# Altium PCB Modular Parent Motherboard.PcbDoc (part 1 of 2)
Units mil, origin at the board's own origin, x right, y up, seen from the top; angles counter-clockwise.
Board outline 8750 x 5625 mil, 4 copper layers (Top Layer, Internal Plane 1, Internal Plane 2, Bottom Layer), stack 30.634 mil thick; 150 components, 101 nets, 734 pads, 495 vias.
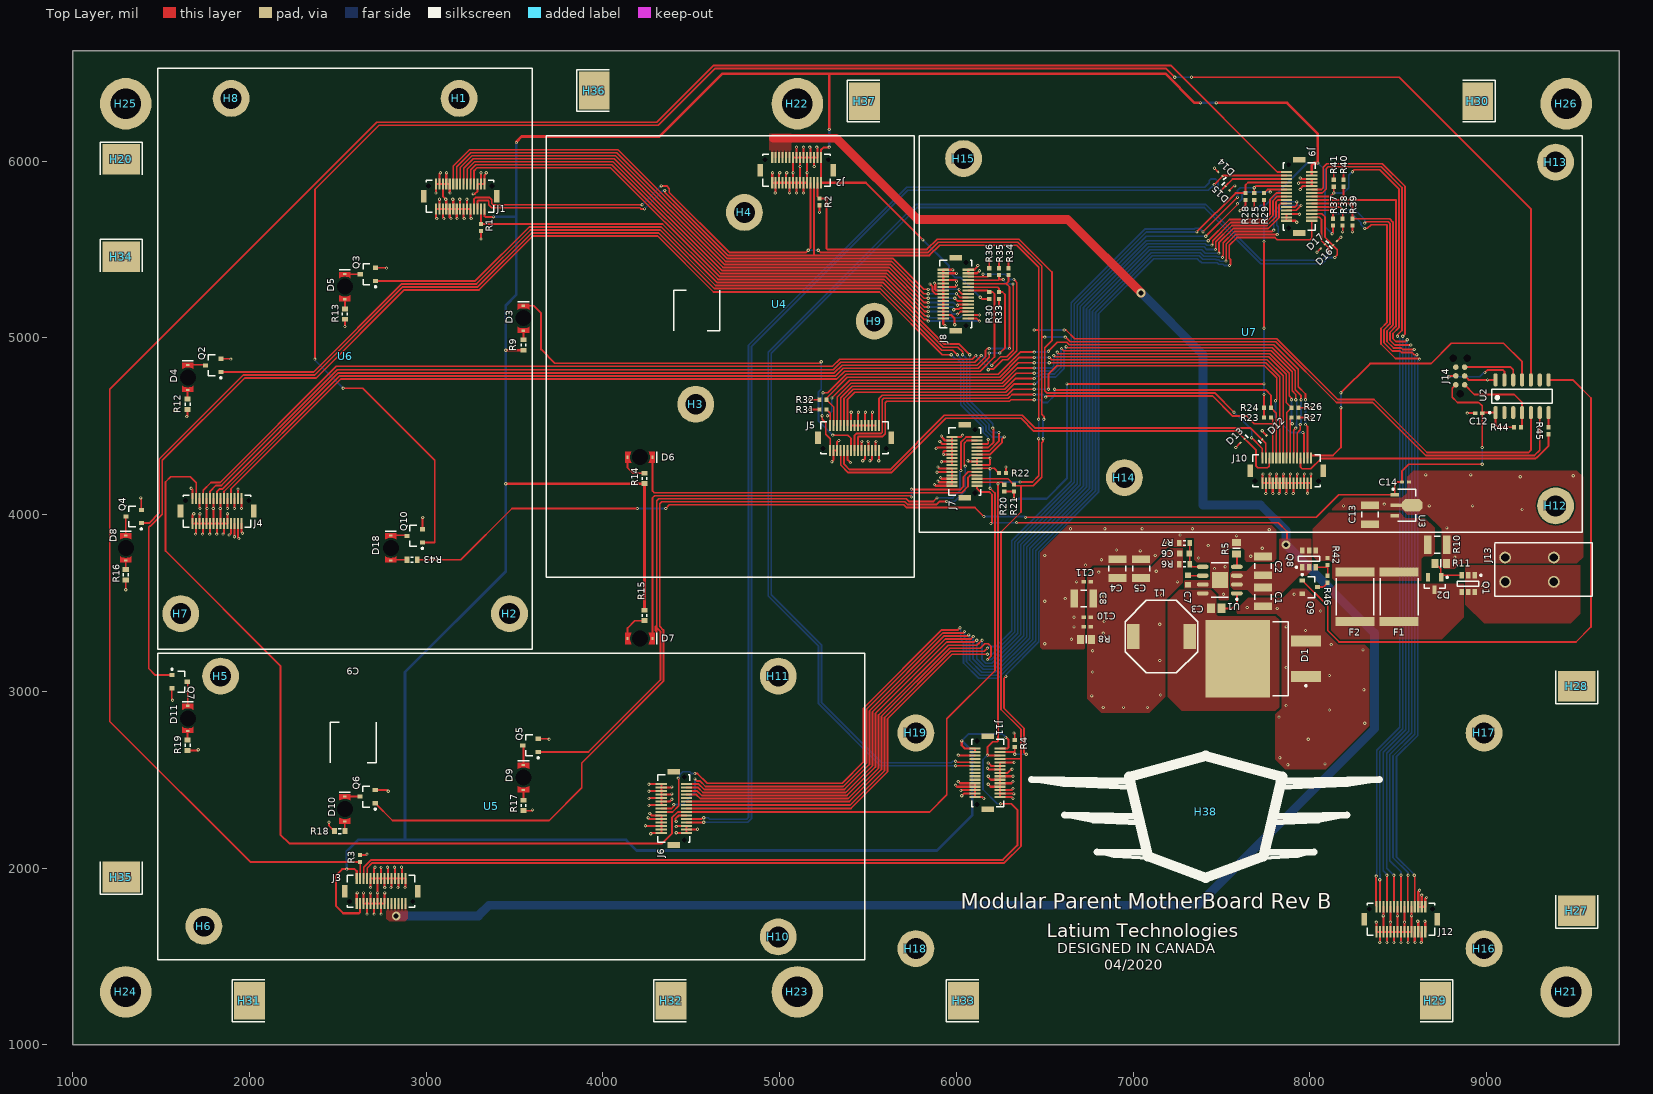
[diagram p0: Top Layer view]
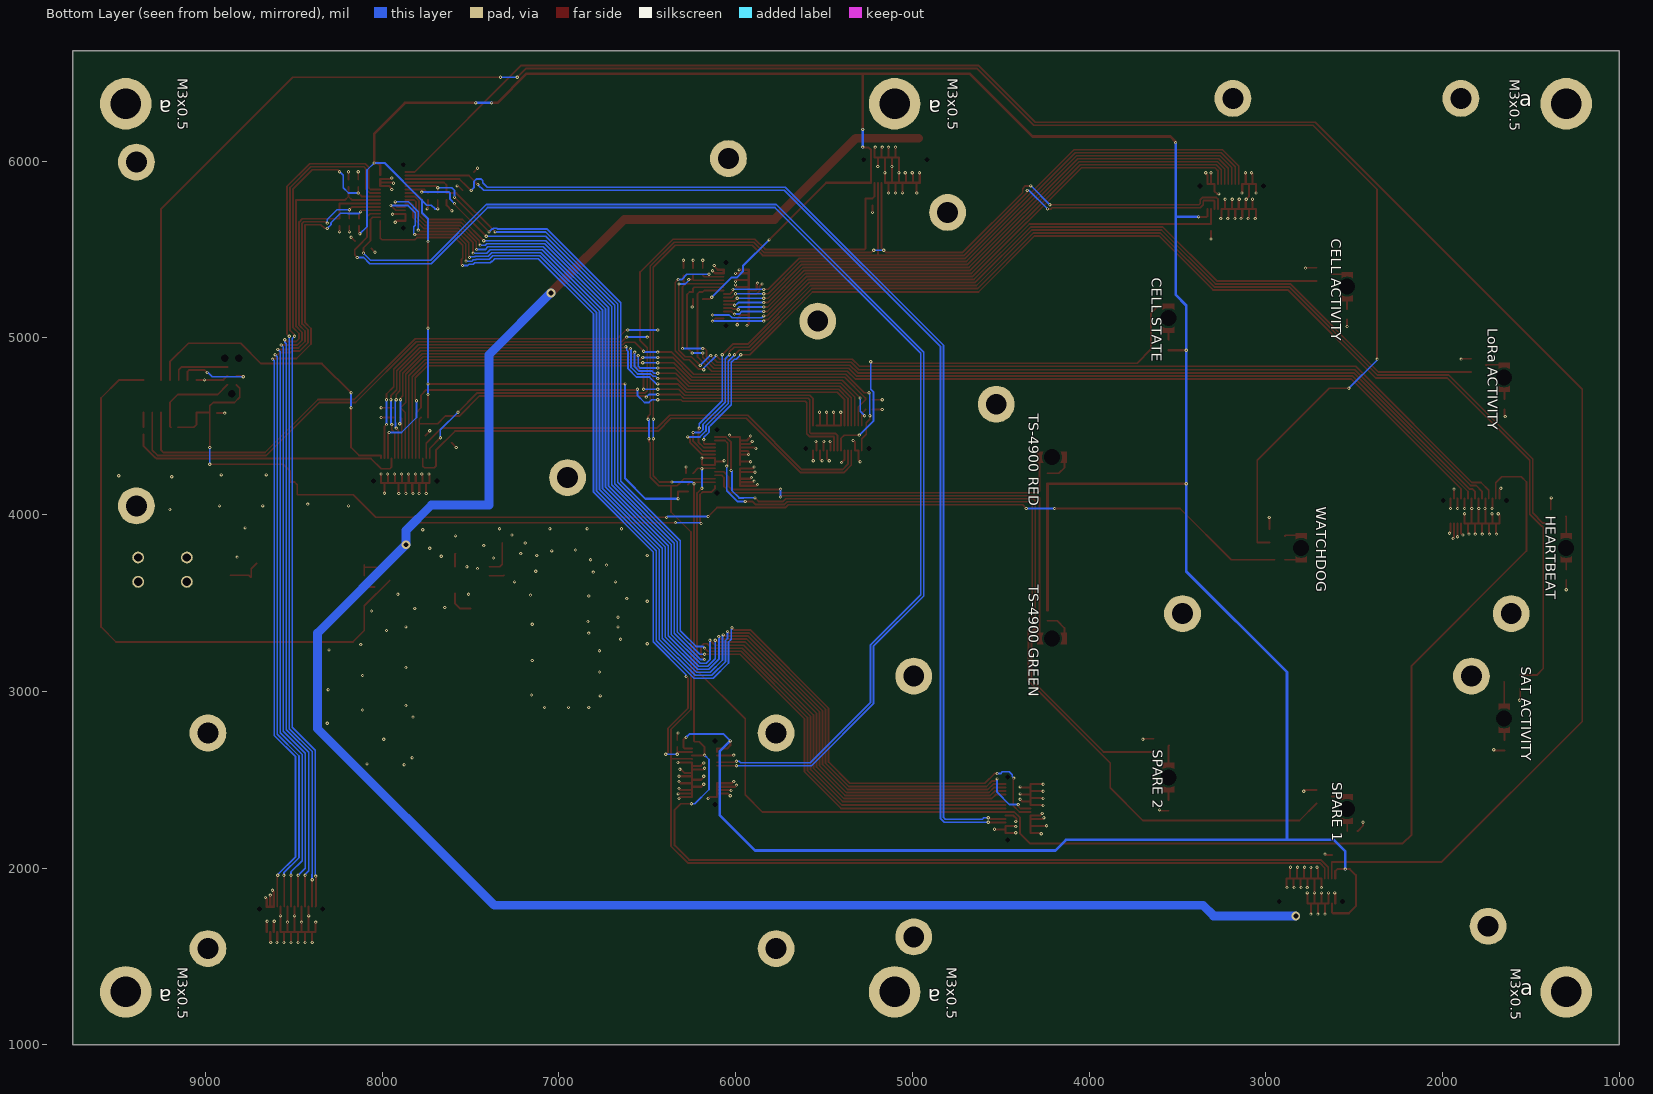
[diagram p1: Bottom Layer view, seen from below]
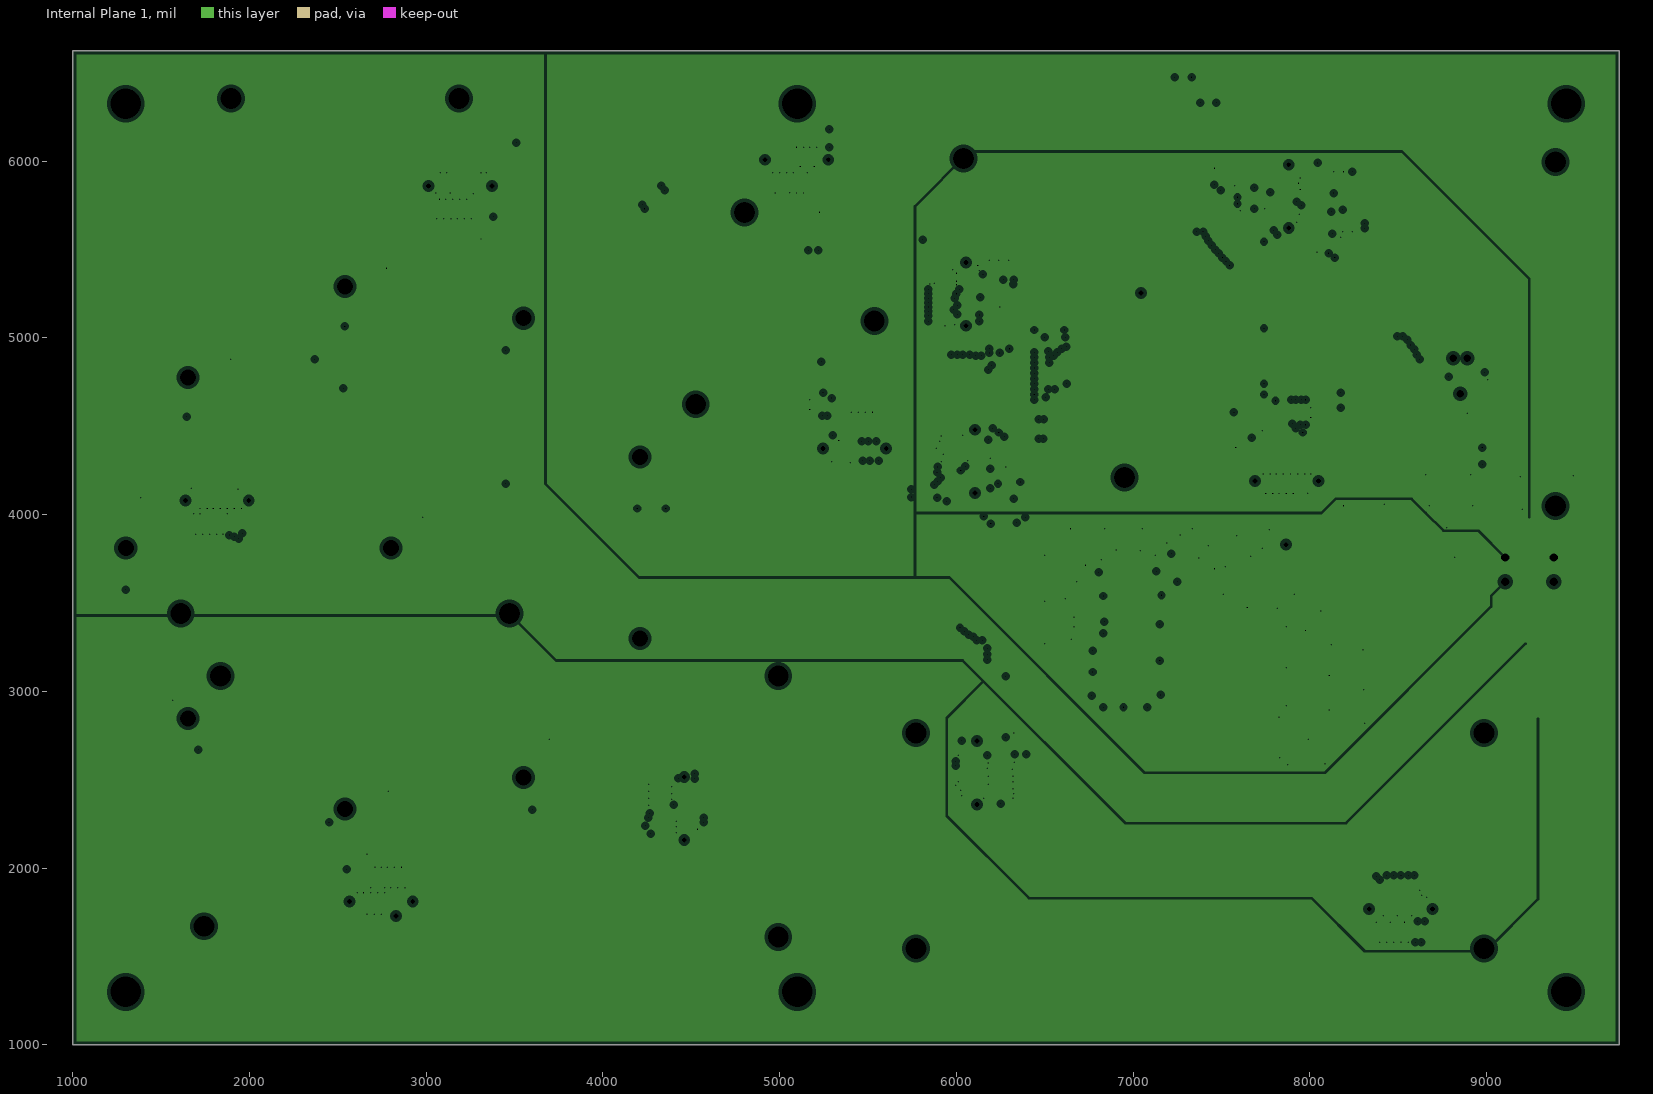
[diagram p2: Internal Plane 1, clearances drawn from the general rule]
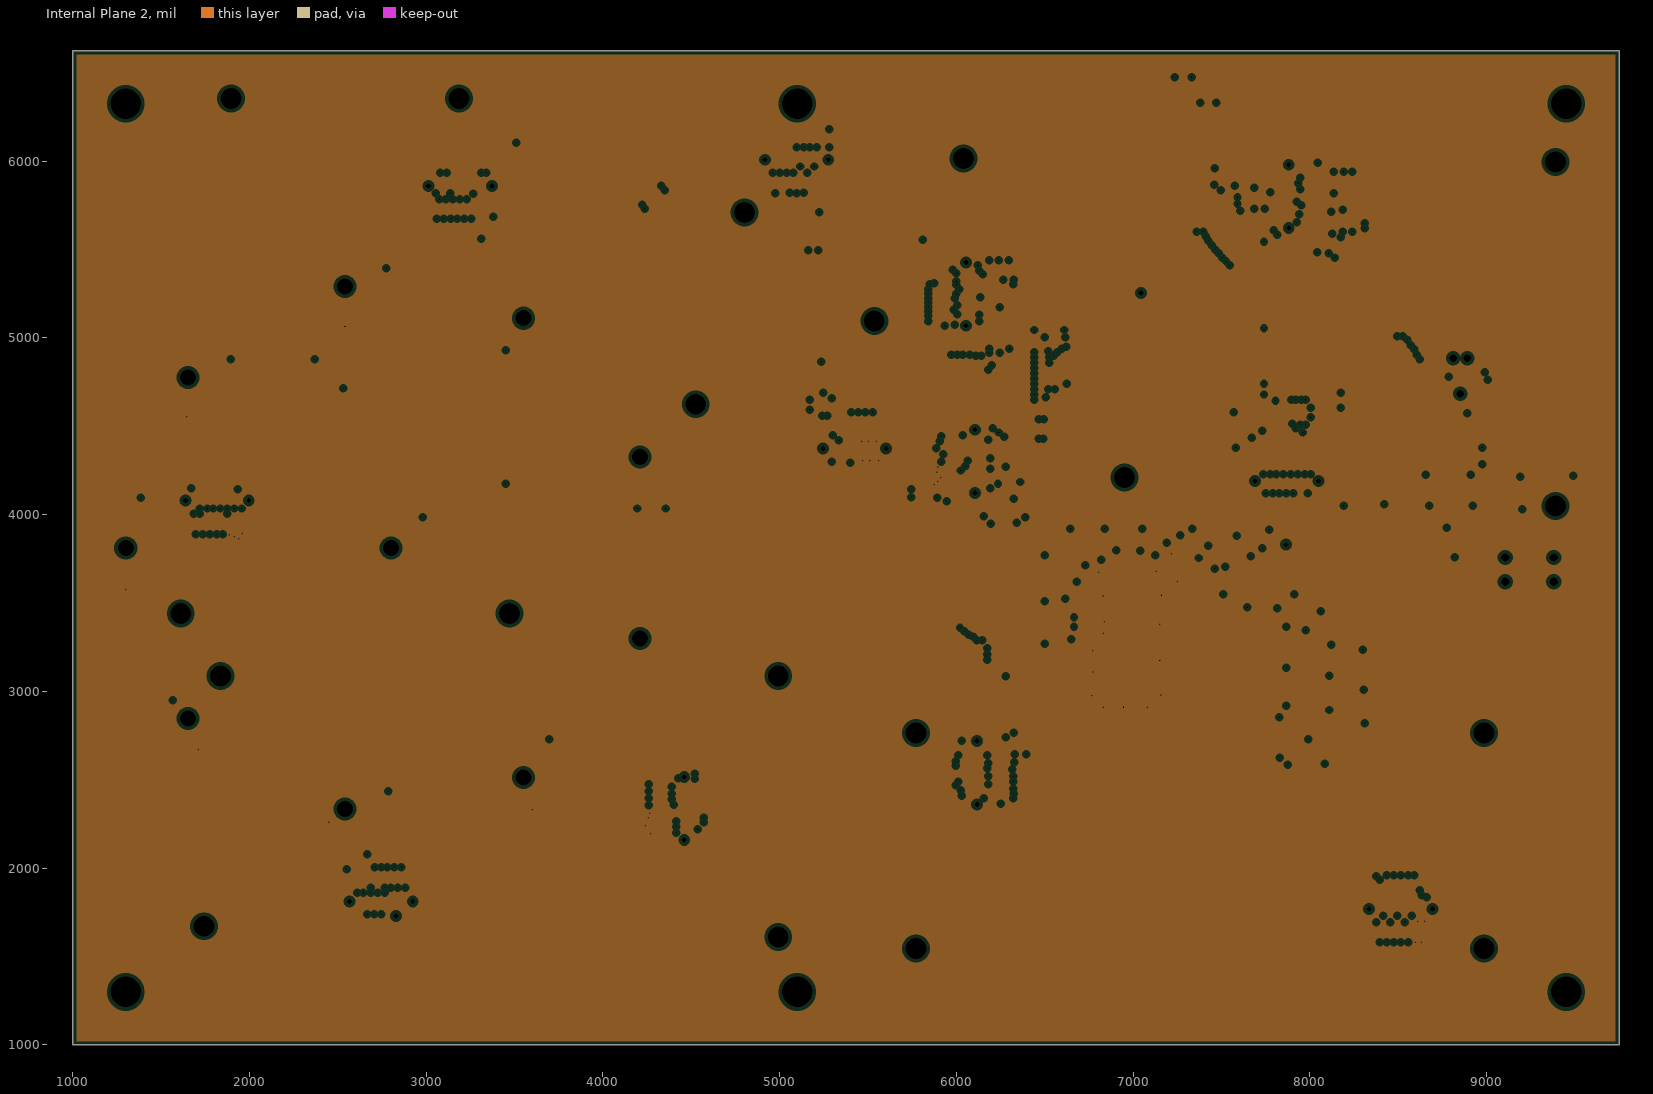
[diagram p3: Internal Plane 2, clearances drawn from the general rule]

## Layer stack, top to bottom
Top Solder: solder mask 0.4, Solder Resist, Dk 3.5
Top Layer: signal copper 1.4
Dielectric 1: core 10, FR-4, Dk 4.2
Internal Plane 1: plane copper 1.417, net GND
Dielectric 3: prepreg 5, Dk 4.2
Internal Plane 2: plane copper 1.417, net 5V
Dielectric 2: core 10, Dk 4.2
Bottom Layer: signal copper 1.4
Bottom Solder: solder mask 0.4, Solder Resist, Dk 3.5

## Board outline
1000,1000 1000,6625 9750,6625 9750,1000

## Design rules (kind name [scope] priority, off if disabled: settings)
Clearance [All] p1: gap=7 ignorepadtopadclearanceinfootprint=FALSE
ComponentClearance "ComponentClearance LoRa Standoff 2" [InComponent('U6') vs InComponent('H2')] p1: gap=0 collisioncheckmode=3 verticalgap=0 showdistances=FALSE
ComponentClearance "ComponentClearance LoRa Standoff 1" [InComponent('U6') vs InComponent('H1')] p2: gap=0 collisioncheckmode=3 verticalgap=0 showdistances=FALSE
ComponentClearance "ComponentClearance LoRa Standoff 3" [InComponent('U6') vs InComponent('H7')] p3: gap=0 collisioncheckmode=3 verticalgap=0 showdistances=FALSE
ComponentClearance "ComponentClearance LoRa Standoff 4" [InComponent('U6') vs InComponent('H8')] p4: gap=0 collisioncheckmode=3 verticalgap=0 showdistances=FALSE
ComponentClearance "ComponentClearance Sat Modem Spacer 1" [InComponent('U5') vs InComponent('H5')] p5: gap=0 collisioncheckmode=3 verticalgap=0 showdistances=FALSE
ComponentClearance "ComponentClearance Sat Modem Spacer 2" [InComponent('U5') vs InComponent('H6')] p6: gap=0 collisioncheckmode=3 verticalgap=0 showdistances=FALSE
ComponentClearance "ComponentClearance Sat Modem Spacer 3" [InComponent('U5') vs InComponent('H10')] p7: gap=0 collisioncheckmode=3 verticalgap=0 showdistances=FALSE
ComponentClearance "ComponentClearance Sat Modem Spacer 4" [InComponent('U5') vs InComponent('H11')] p8: gap=0 collisioncheckmode=3 verticalgap=0 showdistances=FALSE
ComponentClearance "ComponentClearance Controller Standoff 1" [InComponent('U7') vs InComponent('H12')] p9: gap=0 collisioncheckmode=3 verticalgap=0 showdistances=FALSE
ComponentClearance "ComponentClearance Controller Standoff 2" [InComponent('U7') vs InComponent('H13')] p10: gap=0 collisioncheckmode=3 verticalgap=0 showdistances=FALSE
ComponentClearance "ComponentClearance Controller Standoff 3" [InComponent('U7') vs InComponent('H14')] p11: gap=0 collisioncheckmode=3 verticalgap=0 showdistances=FALSE
ComponentClearance "ComponentClearance Controller Standoff 4" [InComponent('U7') vs InComponent('H15')] p12: gap=0 collisioncheckmode=3 verticalgap=0 showdistances=FALSE
ComponentClearance "ComponentClearance Cell Modem Standoff 1" [InComponent('U4') vs InComponent('H3')] p13: gap=0 collisioncheckmode=3 verticalgap=0 showdistances=FALSE
ComponentClearance "ComponentClearance Cell Modem Standoff 2" [InComponent('U4') vs InComponent('H4')] p14: gap=0 collisioncheckmode=3 verticalgap=0 showdistances=FALSE
ComponentClearance "ComponentClearance Cell Modem Standoff 3" [InComponent('U4') vs InComponent('H9')] p15: gap=0 collisioncheckmode=3 verticalgap=0 showdistances=FALSE
ComponentClearance [All] p16: gap=10 collisioncheckmode=3 verticalgap=10 showdistances=FALSE
HoleSize [All] p1: absolutevalues=TRUE maxlimit=250 minlimit=1 maxpercent=80.000 minpercent=20.000
MinimumSolderMaskSliver [All] p1: minsoldermaskwidth=2
PlaneClearance [All] p1: clearance=20
PlaneConnect [All] p1: planeconnectstyle=Relief reliefexpansion=20 reliefentries=4 reliefconductorwidth=10 reliefairgap=10
PolygonConnect PolygonConnect_5V [InNet('5V')] p1: thpad.connectstyle=Relief thpad.reliefconductorwidth=10 thpad.reliefentries=4 thpad.polygonreliefangle="90 Angle" thpad.airgapwidth=10 smdpad.connectstyle=Direct smdpad.reliefconductorwidth=10 smdpad.reliefentries=4 smdpad.polygonreliefangle="90 Angle" smdpad.airgapwidth=10 via.connectstyle=Relief via.reliefconductorwidth=10 via.reliefentries=4 via.polygonreliefangle="90 Angle" via.airgapwidth=10
PolygonConnect PolygonConnect_NetC3_1 [InNet('NetC3_1')] p2: thpad.connectstyle=Relief thpad.reliefconductorwidth=10 thpad.reliefentries=4 thpad.polygonreliefangle="90 Angle" thpad.airgapwidth=10 smdpad.connectstyle=Direct smdpad.reliefconductorwidth=10 smdpad.reliefentries=4 smdpad.polygonreliefangle="90 Angle" smdpad.airgapwidth=10 via.connectstyle=Relief via.reliefconductorwidth=10 via.reliefentries=4 via.polygonreliefangle="90 Angle" via.airgapwidth=10
PolygonConnect PolygonConnect_NetD2_3 [InNet('NetD2_3')] p3: thpad.connectstyle=Relief thpad.reliefconductorwidth=10 thpad.reliefentries=4 thpad.polygonreliefangle="90 Angle" thpad.airgapwidth=10 smdpad.connectstyle=Direct smdpad.reliefconductorwidth=10 smdpad.reliefentries=4 smdpad.polygonreliefangle="90 Angle" smdpad.airgapwidth=10 via.connectstyle=Relief via.reliefconductorwidth=10 via.reliefentries=4 via.polygonreliefangle="90 Angle" via.airgapwidth=10
PolygonConnect PolygonConnect_FVin [InNet('FVin')] p4: thpad.connectstyle=Relief thpad.reliefconductorwidth=10 thpad.reliefentries=4 thpad.polygonreliefangle="90 Angle" thpad.airgapwidth=10 smdpad.connectstyle=Direct smdpad.reliefconductorwidth=10 smdpad.reliefentries=4 smdpad.polygonreliefangle="90 Angle" smdpad.airgapwidth=10 via.connectstyle=Relief via.reliefconductorwidth=10 via.reliefentries=4 via.polygonreliefangle="90 Angle" via.airgapwidth=10
PolygonConnect PolygonConnect_PVin_J3 [InNet('PVin') vs HasFootprint('10132798-031100LF')] p5: connectstyle=Relief reliefconductorwidth=10 reliefentries=4 polygonreliefangle="90 Angle" airgapwidth=10
PolygonConnect PolygonConnect_PVin_J2 [InNet('PVin') vs HasFootprint('10132798-031100LF')] p6: connectstyle=Relief reliefconductorwidth=10 reliefentries=4 polygonreliefangle="90 Angle" airgapwidth=10
PolygonConnect PolygonConnect_PVin [InNet('PVin')] p7: thpad.connectstyle=Relief thpad.reliefconductorwidth=10 thpad.reliefentries=4 thpad.polygonreliefangle="90 Angle" thpad.airgapwidth=10 smdpad.connectstyle=Direct smdpad.reliefconductorwidth=10 smdpad.reliefentries=4 smdpad.polygonreliefangle="90 Angle" smdpad.airgapwidth=10 via.connectstyle=Relief via.reliefconductorwidth=10 via.reliefentries=4 via.polygonreliefangle="90 Angle" via.airgapwidth=10
PolygonConnect PolygonConnect_Vin [InNet('Vin')] p8: thpad.connectstyle=Direct thpad.reliefconductorwidth=10 thpad.reliefentries=4 thpad.polygonreliefangle="90 Angle" thpad.airgapwidth=10 smdpad.connectstyle=Direct smdpad.reliefconductorwidth=10 smdpad.reliefentries=4 smdpad.polygonreliefangle="90 Angle" smdpad.airgapwidth=10 via.connectstyle=Relief via.reliefconductorwidth=10 via.reliefentries=4 via.polygonreliefangle="90 Angle" via.airgapwidth=10
PolygonConnect PolygonConnect_GND [InNet('GND')] p9: thpad.connectstyle=Direct thpad.reliefconductorwidth=10 thpad.reliefentries=4 thpad.polygonreliefangle="90 Angle" thpad.airgapwidth=10 smdpad.connectstyle=Direct smdpad.reliefconductorwidth=10 smdpad.reliefentries=4 smdpad.polygonreliefangle="90 Angle" smdpad.airgapwidth=10 via.connectstyle=Relief via.reliefconductorwidth=10 via.reliefentries=4 via.polygonreliefangle="90 Angle" via.airgapwidth=10
PolygonConnect [All] p10: connectstyle=Relief reliefconductorwidth=10 reliefentries=4 polygonreliefangle="90 Angle" airgapwidth=10
RoutingVias [All] p1: holewidth=8 width=18 viastyle="Through Hole" minholewidth=8 minwidth=18 maxholewidth=28 maxwidth=50
SilkToSilkClearance [All] p1: silktosilkclearance=5
SilkToSolderMaskClearance [IsPad] p1: minsilkscreentomaskgap=2 clearancetoexposedcopper=TRUE
SolderMaskExpansion [All] p1: expansion=0
Width [All] p1: maxlimit=250 minlimit=7 preferedwidth=10
23 further rules are at their usual default settings.

## Classes and differential pairs
component class "Concentrator and Cell Modem Headers": H1 H2 H3 H4 H5 H6 H7 H8 H9 H10 H11 H20 H27 H28 H29 H30 H31 H32 H33 H34 H35 H36 H37 J1 J2 J3 J4 J5 J6 R1 R2 R3 U4 U5 U6
component class "Controller Headers": H12 H13 H14 H15 J7 J8 J9 J10 U7
component class "Controller Watchdog": C12 C13 C14 J14 R44 R45 U2 U3
component class "Expansion Headers": H16 H17 H18 H19 H21 H22 H23 H24 H25 H26 H38 J11 J12 R4
component class "Power Supply and LEDs": C1 C2 C3 C4 C5 C6 C7 C8 C9 C10 C11 D1 D2 D3 D4 D5 D6 D7 D8 D9 D10 D11 D18 F1 F2 J13 L1 Q1 Q2 Q3 Q4 Q5 Q6 Q7 Q8 Q9 Q10 R5 R6 R7 R8 R9 R10 R11 R12 R13 R14 R15 R16 R17 R18 R19 R42 R43 R46 U1
component class "Slot Pullups and Pulldowns": D12 D13 D14 D15 D16 D17 R20 R21 R22 R23 R24 R25 R26 R27 R28 R29 R30 R31 R32 R33 R34 R35 R36 R37 R38 R39 R40 R41

## Components (designator, comment, footprint, x,y, rotation, side; value= is the part's Value field where it differs from the comment)
C1 "10uF 63V 10% X7R" C1210_L 7735,3535 r90 top
C2 "10uF 63V 10% X7R" C1210_L 7735,3710 r270 top
C3 "0.1uF 100V 10% X7R" C0805 7470,3470 r0 top
C4 "100uF 10V 20% X5R" C1210_L 6910,3695 r270 top
C5 "100uF 10V 20% X5R" C1210_L 7045,3695 r270 top
C6 "220pF 50V 10% X7R" 1608[0603] 7290,3780 r180 top
C7 "8.2nF 50V 5% NP0" 1608[0603] 7310,3630 r90 top
C8 "100uF 10V 20% X5R" C1210_L 6720,3525 r0 top
C9 "0.1uF 50V 10% X7R" CAPC1005L 6740,3365 r180 top
C10 "0.1uF 50V 10% X7R" CAPC1005L 6740,3420 r180 top
C11 "0.1uF 50V 10% X7R" CAPC1005L 6740,3620 r180 top
C12 "0.1uF 50V 10% X7R" CAPC1005L 8955,4575 r180 top
C13 "10uF 63V 10% X7R" C1210_L 8340,4000 r270 top
C14 "1uF 6.3V 10% X7R" CAPC1005L 8540,4185 r0 top
D1 "STPS20M100SG" ONSC-D2PAK-3-418AJ_A_V 7735,3185 r180 top
D2 "BZX84C10LT1G" SOT23-3_L 8705,3610 r270 top
D3 "Green 2V 20mA Rev" "1206 REVERSE LED" 3550,5111.5 r90 top
D4 "Yellow 2V 20mA Rev" "1206 REVERSE LED" 1651,4777 r90 top
D5 "Yellow 2V 20mA Rev" "1206 REVERSE LED" 2540,5290 r90 top
D6 "Red 2V 20mA Rev" "1206 REVERSE LED" 4209.5,4325.5 r0 top
D7 "Green 2V 20mA Rev" "1206 REVERSE LED" 4209.5,3299.5 r0 top
D8 "Blue 3.2V 20mA Rev" "1206 REVERSE LED" 1300,3812.5 r90 top
D9 "Yellow 2V 20mA Rev" "1206 REVERSE LED" 3550,2513.5 r90 top
D10 "Yellow 2V 20mA Rev" "1206 REVERSE LED" 2540,2335 r90 top
D11 "Yellow 2V 20mA Rev" "1206 REVERSE LED" 1651,2848 r90 top
D12 "ESD9L5.0ST5G" SOD-923 7753.38,4448.38 r225 top
D13 "ESD9L5.0ST5G" SOD-923 7606.62,4406.62 r45 top
D14 "ESD9L5.0ST5G" SOD-923 7481.62,5938.38 r315 top
D15 "ESD9L5.0ST5G" SOD-923 7545,5835 r135 top
D16 "ESD9L5.0ST5G" SOD-923 8153.38,5548.38 r225 top
D17 "ESD9L5.0ST5G" SOD-923 8061.62,5506.62 r45 top
D18 "White 3.2V 20mA Rev" "1206 REVERSE LED" 2800,3812.5 r90 top
F1 "3A 24V" 2920 8505,3395.47 r90 top
F2 "3A 24V" 2920 8255,3395.47 r90 top
H1 "9774030243R" "WURTH 9774030243R" 3186.26,6355 r180 top locked
H2 "9774030243R" "WURTH 9774030243R" 3471.26,3440 r180 top locked
H3 "9774030243R" "WURTH 9774030243R" 4525,4625 r0 top locked
H4 "9774030243R" "WURTH 9774030243R" 4800,5710 r0 top locked
H5 "9774030243R" "WURTH 9774030243R" 1836.73,3086.53 r270 top locked
H6 "9774030243R" "WURTH 9774030243R" 1741.73,1671.54 r270 top locked
H7 "9774030243R" "WURTH 9774030243R" 1611.26,3440 r180 top locked
H8 "9774030243R" "WURTH 9774030243R" 1896.26,6355 r180 top locked
H9 "9774030243R" "WURTH 9774030243R" 5535,5095 r0 top locked
H10 "9774030243R" "WURTH 9774030243R" 4991.73,1611.54 r270 top locked
H11 "9774030243R" "WURTH 9774030243R" 4991.73,3086.53 r270 top locked
H12 "9774030243R" "WURTH 9774030243R" 9390,4050 r90 top locked
H13 "9774030243R" "WURTH 9774030243R" 9390,5995 r90 top locked
H14 "9774030243R" "WURTH 9774030243R" 6950,4210 r90 top locked
H15 "9774030243R" "WURTH 9774030243R" 6040,6015 r90 top locked
H16 "9774030243R" "WURTH 9774030243R" 8985,1545 r0 top
H17 "9774030243R" "WURTH 9774030243R" 8985,2765 r0 top
H18 "9774030243R" "WURTH 9774030243R" 5770,1545 r0 top
H19 "9774030243R" "WURTH 9774030243R" 5770,2765 r0 top
H20 "S8101-46R" "COAX CABLE CLIP" 1275,6010 r0 top
H21 "9774030360R" "WURTH 9774060360R" 9450,1300 r0 top locked
H22 "9774030360R" "WURTH 9774060360R" 5100,6325 r0 top locked
H23 "9774030360R" "WURTH 9774060360R" 5100,1300 r0 top locked
H24 "9774030360R" "WURTH 9774060360R" 1300,1300 r0 top locked
H25 "9774030360R" "WURTH 9774060360R" 1300,6325 r0 top locked
H26 "9774030360R" "WURTH 9774060360R" 9450,6325 r0 top locked
H27 "S8101-46R" "Coax Cable Clip" 9510,1760 r180 top
H28 "S8101-46R" "Coax Cable Clip" 9510,3030 r180 top
H29 "S8101-46R" "Coax Cable Clip" 8710,1250 r270 top
H30 "S8101-46R" "Coax Cable Clip" 8950,6340 r270 top
H31 "S8101-46R" "Coax Cable Clip" 2000,1250 r90 top
H32 "S8101-46R" "Coax Cable Clip" 4385,1250 r90 top
H33 "S8101-46R" "Coax Cable Clip" 6040,1250 r90 top
H34 "S8101-46R" "Coax Cable Clip" 1275,5460 r0 top
H35 "S8101-46R" "Coax Cable Clip" 1275,1950 r180 top
H36 "S8101-46R" "Coax Cable Clip" 3950,6400 r90 top
H37 "S8101-46R" "Coax Cable Clip" 5480,6340 r90 top
H38 "Latium Logo" LatiumLogo 7410,2320 r0 top
J1 "30 Pin SMD Receptacle" 10132798-031100LF 3330,5730 r180 top locked
J2 "30 Pin SMD Receptacle" 10132798-031100LF 5233.11,5878.27 r180 top locked
J3 "30 Pin SMD Receptacle" 10132798-031100LF 2606.73,1941.54 r0 top locked
J4 "30 Pin SMD Receptacle" 10132798-031100LF 1954.37,3950 r180 top locked
J5 "30 Pin SMD Receptacle" 10132798-031100LF 5285.63,4505 r0 top locked
J6 "30 Pin SMD Receptacle" 10132798-031100LF 4330,2200 r90 top locked
J7 "30 Pin SMD Receptacle" 10132798-031100LF 5975,4163.78 r90 top locked
J8 "30 Pin SMD Receptacle" 10132798-031100LF 5925,5110.31 r90 top locked
J9 "30 Pin SMD Receptacle" 10132798-031100LF 8010,5938.43 r270 top locked
J10 "30 Pin SMD Receptacle" 10132798-031100LF 7730.63,4320 r0 top locked
J11 "30 Pin SMD Receptacle" 10132798-031100LF 6246.73,2677.48 r270 top
J12 "30 Pin SMD Receptacle" 10132798-031100LF 8652.17,1640 r180 top
J13 "1824420000" 1824420000 9104.41,3620 r90 top
J14 "Tag-Connect" TC2030-MCP 8875,4735 r90 top
L1 "3uH 6.2A R0072" SRU1048 7318.9,3310 r180 top
Q1 "DMP6110SVT-7" SOT23-6_L 8895,3610 r270 top
Q2 "2N7002" INF-PG-SOT23_L 1795,4845 r180 top
Q3 "2N7002" INF-PG-SOT23_L 2670,5360 r180 top
Q4 "2N7002" INF-PG-SOT23_L 1345,3990 r180 top
Q5 "2N7002" INF-PG-SOT23_L 3590,2695 r180 top
Q6 "2N7002" INF-PG-SOT23_L 2668.31,2405 r180 top
Q7 "2N7002" INF-PG-SOT23_L 1605,3055 r0 top
Q8 "DMP6110SVT-7" SOT23-6_L 7995,3750 r90 top
Q9 "2N7002" INF-PG-SOT23_L 8000,3590 r0 top
Q10 "2N7002" INF-PG-SOT23_L 2935,3880 r180 top
R1 "10k 1% 63mW" RESC1005L 3310,5625 r90 top
R2 "10k 1% 63mW" RESC1005L 5225,5770 r90 top
R3 "10k 1% 63mW" RESC1005L 2625,2055 r270 top
R4 "10k 1% 63mW" RESC1005L 6330,2704.69 r270 top
R5 "24.9k 1% 125mW" 6-0805_L 7585,3810 r270 top
R6 "68k 1% 100mW" J1-0603 7290,3720 r180 top
R7 "12k 1% 100mW" J1-0603 7290,3840 r0 top
R8 "5.5V 120A" 6-0805_L 6733.5,3295 r0 top
R9 "150R 1% 100mW" RESC1608L 3550,4960 r270 top
R10 "39V 280A" RESC3225L 8720,3830 r180 top
R11 "2.2k 1% 125mW" 6-0805_L 8740,3725 r180 top
R12 "150R 1% 100mW" RESC1608L 1650,4625 r90 top
R13 "150R 1% 100mW" RESC1608L 2540,5135 r90 top
R14 "150R 1% 100mW" RESC1608L 4235,4205 r270 top
R15 "150R 1% 100mW" RESC1608L 4235,3430 r90 top
R16 "100R 1% 100mW" RESC1608L 1300,3660 r90 top
R17 "150R 1% 100mW" RESC1608L 3550,2355 r90 top
R18 "150R 1% 100mW" RESC1608L 2510,2210 r0 top
R19 "150R 1% 100mW" RESC1608L 1650,2695 r90 top
R20 "2.2k 1% 63mW" RESC1005L 6270,4150 r270 top
R21 "2.2k 1% 63mW" RESC1005L 6325,4150.31 r270 top
R22 "10k 1% 63mW" RESC1005L 6260,4235 r180 top
R23 "10k 1% 63mW" RESC1005L 7760.31,4550 r180 top
R24 "10k 1% 63mW" RESC1005L 7759.69,4605 r180 top
R25 "10k 1% 63mW" RESC1005L 7685,5800 r270 top
R26 "10k 1% 63mW" RESC1005L 7915,4605 r180 top
R27 "10k 1% 63mW" RESC1005L 7915,4550 r180 top
R28 "10k 1% 63mW" RESC1005L 7635,5799.69 r90 top
R29 "10k 1% 63mW" RESC1005L 7740,5800 r90 top
R30 "10k 1% 63mW" RESC1005L 6185,5240 r270 top
R31 "10k 1% 63mW" RESC1005L 5244.69,4595 r0 top
R32 "10k 1% 63mW" RESC1005L 5245,4650 r0 top
R33 "10k 1% 63mW" RESC1005L 6240,5240 r90 top
R34 "10k 1% 63mW" RESC1005L 6295,5375 r270 top
R35 "10k 1% 63mW" RESC1005L 6240,5375 r270 top
R36 "10k 1% 63mW" RESC1005L 6185,5375 r270 top
R37 "10k 1% 63mW" RESC1005L 8130,5655 r270 top
R38 "10k 1% 63mW" RESC1005L 8185,5655 r90 top
R39 "10k 1% 63mW" RESC1005L 8240,5655 r90 top
R40 "10k 1% 63mW" RESC1005L 8190,5875.31 r270 top
R41 "10k 1% 63mW" RESC1005L 8135,5875 r270 top
R42 "10k 1% 63mW" RESC1005L 8100,3734.68 r90 top
R43 "4.7R 1% 100mW" RESC1608L 2920,3745 r180 top
R44 "10k 1% 63mW" RESC1005L 9175,4495 r0 top
R45 "33R 1% 63mW" RESC1005L 9350,4475 r270 top
R46 "10k 1% 63mW" RESC1005L 8100,3635 r90 top
U1 "LMR14050SDDAR" MRA08A_L 7490,3630 r180 top
U2 "PIC16F15323T-I/SL" 14SOP_L 9200,4670 r90 top
U3 "3.3V 150mA" SOT89L 8546.93,4054.06 r0 top
U4 "SIMCOM Cell Modem Daughterboard" "SIMCOM CELL MODEM DAUGHTERBOARD" 3680,3645 r0 top locked
U5 "OrbComm OG2 Sat Modem Daughterboard" "ORBCOMM OG2 DAUGHTERBOARD" 5481.73,1481.54 r90 top locked
U6 "RG191-M2 Daughterboard" "RG191-M2 LORA DAUGHTERBOARD" 1481.26,3240 r0 top locked
U7 "TS-4900 Daughterboard" "TS-4900 DAUGHTERBOARD" 9540,3900 r90 top locked

## Footprints (in the part's own frame and the unit in brackets; to place one, negate y for a bottom-side part, rotate by r counter-clockwise, add the part's x,y. Pads: shape width x height; smd on the part's side, far side on the other; paste and mask are expansions set on the pad)
6-0805_L [mm] "Chip Resistor, Body 2.0x1.2mm, IPC High Density"
  rect 1x1.3 smd: 1(-0.8,0) 2(0.8,0)
  silkscreen extent 0,-0.55 0,0.55, body extent -1.07,-0.7 1.07,0.7, height 0.7
14SOP_L [mm] "SOIC, 14-Leads, Body 8.7x3.9mm, Pitch 1.27mm, IPC High Density"
  oval 1.9x0.6 smd: 1(-2.35,3.81) 2(-2.35,2.54) 3(-2.35,1.27) 4(-2.35,0) 5(-2.35,-1.27) 6(-2.35,-2.54) 7(-2.35,-3.81) 8(2.35,-3.81) 9(2.35,-2.54) 10(2.35,-1.27) 11(2.35,0) 12(2.35,1.27) 13(2.35,2.54) 14(2.35,3.81)
  silkscreen extent -2.47,-4.35 1,4.78, body extent -1.99,-4.37 1.99,4.37, height 1.75
"1206 REVERSE LED" [mm] "Wurth WL-SMRW SMT Reverse Mount LED 1206"
  rect 0.3x0.5 smd: 1(-1.8,0) 2(1.8,0)
  round 0.1 hole 2.3 unplated: MH(0,0)
  Top Layer region: 1.233,-0.8 2.1,-0.8 2.1,0.8 1.233,0.8 1.233,0.8 1.443,0.28 1.443,-0.28 1.233,-0.8
  Top Layer region: -2.1,-0.8 -2.1,0.8 -1.233,0.8 -1.233,0.8 -1.443,0.28 -1.443,-0.28 -1.233,-0.8 -1.233,-0.8 -1.233,-0.8
  silkscreen extent 2.4,-0.8 2.4,0.8, body extent -2.1,-0.8 2.1,0.8, height 0.3
1608[0603] [mm] "Chip Capacitor, Body 1.6x0.8mm, IPC High Density"
  rect 0.8x0.9 smd: 1(-0.7,0) 2(0.7,0)
  body extent -0.87,-0.48 0.87,0.48, height 1.3
2920 [mm] "2920 SMD Footprint (7351 Metric)"
  rect 1.3x5.6 smd: 1(0,0) 2(7.1,0)
  silkscreen extent 0.9,-2.7 6.2,2.7, body extent -0.3,-2.7 7.5,2.7, height 1.1
10132798-031100LF [mm] "Amphenol BergStak 30 Pos SMD Receptacle"
  rect 0.3x1.6 smd: 1(0,0) 2(0.5,0) 3(1,0) 4(1.5,0) 5(2,0) 6(2.5,0) 7(3,0) 8(3.5,0) 9(4,0) 10(4.5,0) 11(5,0) 12(5.5,0) 13(6,0) 14(6.5,0) 15(7,0) 16(7,-3.6) 17(6.5,-3.6) 18(6,-3.6) 19(5.5,-3.6) 20(5,-3.6) 21(4.5,-3.6) 22(4,-3.6) 23(3.5,-3.6) 24(3,-3.6) 25(2.5,-3.6) 26(2,-3.6) 27(1.5,-3.6) 28(1,-3.6) 29(0.5,-3.6) 30(0,-3.6)
  round 0.3 hole 0.7 unplated: MH(-1.05,-3.3) MH(8.05,-3.3)
  rect 0.8x1.8 smd: MP1(-1.75,-1.8) MP2(8.75,-1.8)
  silkscreen extent -1.35,-4.1 8.35,0.5, body extent -1.4,-4.1 8.4,0.5, height 2.15
1824420000 [mm] "Weidmuller 2 Pos Side Entry Terminal"
  round 1.7 hole 1.2: 1(0,0) 2(0,-7) 3(3.5,0) 4(3.5,-7)
  silkscreen extent -2.1,-12.5 5.6,1.5, body extent -2.1,-12.5 5.6,1.5, height 8.5
C0805 [mm] "Chip Capacitor, Body 2.0x1.3mm, IPC High Density"
  rect 1.1x1.4 smd: 1(-0.75,0) 2(0.75,0)
  body extent -1.1,-0.72 1.1,0.72, height 1.4
C1210_L [mm] "Chip Capacitor, Body 3.2x2.5mm, IPC High Density"
  rect 1.1x2.6 smd: 1(-1.35,0) 2(1.35,0)
  silkscreen extent -0.4,-1.2 0.4,1.2, body extent -1.7,-1.35 1.7,1.35, height 1.5
CAPC1005L [mm] "Chip Capacitor, Body 1.0x0.5mm, IPC High Density"
  rect 0.6x0.5 smd: 1(-0.5,0) 2(0.5,0)
  body extent -0.55,-0.3 0.55,0.3, height 0.6
"COAX CABLE CLIP" [mm] "Harwin Coaxial Cable Clip, use with U.FL - RP SMA Cable"
  rect 5.4x4.4 smd: MP(0,0)
  silkscreen extent -3,-2.2 3,2.5, body extent -2.7,-2.2 2.7,2.2, height 1.5
"Coax Cable Clip" [mm] "Harwin Coaxial Cable Clip, use with U.FL - RP SMA Cable"
  rect 5.4x4.4 smd: MP(0,0)
  silkscreen extent -3,-2.2 3,2.5, body extent -2.7,-2.2 2.7,2.2, height 1.5
INF-PG-SOT23_L [mm] "SOT23, 3-Leads, Body 2.9x1.3mm, Pitch 0.95mm, IPC High Density"
  rect 0.75x0.6 smd: 1(-1.1,0.95) 2(-1.1,-0.95) 3(1.1,0)
  silkscreen extent -1.23,-1.5 0.7,1.92, body extent -0.7,-1.5 0.7,1.5, height 1.1
J1-0603 [mm] "Chip Resistor, Body 1.6x0.8mm, IPC High Density"
  rect 0.7x0.9 smd: 1(-0.75,0) 2(0.75,0)
  silkscreen extent -0.2,-0.35 0.2,0.35, body extent -0.85,-0.48 0.85,0.48, height 0.9
LatiumLogo [mil] "Latium Logo"
  silkscreen extent -984,-374 984,315
MRA08A_L [mm] "SOIC, 8-Leads, Body 4.9x3.9mm, Pitch 1.27mm, Exposed Pad, IPC High Density"
  oval 1.7x0.6 smd: 1(-2.45,1.905) 2(-2.45,0.635) 3(-2.45,-0.635) 4(-2.45,-1.905) 5(2.45,-1.905) 6(2.45,-0.635) 7(2.45,0.635) 8(2.45,1.905)
  rect 2.29x2.29 smd: 9(0,0)
  silkscreen extent -2.58,-2.5 1.2,2.88, body extent -2,-2.5 2,2.5, height 1.68
ONSC-D2PAK-3-418AJ_A_V [mil] "DPAK, 3-Leads, Body 10.16x9.015mm, Pitch 2.54mm"
  rect 169x63 smd: 1(-242.13,100) 3(-242.13,-100)
  rect 366x436 smd: 4(143.7,0)
  silkscreen extent -247,-210 -55,210, body extent -148,-200 207,200, height 196
"ORBCOMM OG2 DAUGHTERBOARD" [mil] "Latium OrbComm OG2 Sat Modem Daughterboard"
  round 20 on Mech15: GD(130,490) GD(190,3740) GD(318.27,2875) GD(460,2875) GD(718.46,1010) GD(718.46,1151.73) GD(1190.94,2823.27) GD(1190.94,2965) GD(1605,3645) GD(1605,490)
  silkscreen extent 0,0 1735,4000, body extent 0,0 1735,4000, height 630
RESC1005L [mm] "Chip Resistor, Body 1.1x0.5mm, IPC High Density"
  rect 0.6x0.6 smd: 1(-0.5,0) 2(0.5,0)
  body extent -0.55,-0.3 0.55,0.3, height 0.4
RESC1608L [mm] "Chip Resistor, Body 1.6x0.8mm, IPC High Density"
  rect 0.7x0.9 smd: 1(-0.75,0) 2(0.75,0)
  silkscreen extent -0.2,-0.35 0.2,0.35, body extent -0.85,-0.48 0.85,0.48, height 0.6
RESC3225L [mm] "Chip Resistor, Body 3.2x2.5mm, IPC High Density"
  rect 1.1x2.6 smd: 1(-1.35,0) 2(1.35,0)
  silkscreen extent -0.4,-1.2 0.4,1.2, body extent -1.68,-1.32 1.68,1.32, height 0.71
"RG191-M2 LORA DAUGHTERBOARD" [mil] "Latium RG191-M2 Daughterboard"
  round 20 on Mech15: GD(130,200) GD(415,3115) GD(473.11,710) GD(473.11,851.73) GD(1705,3115) GD(1848.74,2490) GD(1848.74,2631.73) GD(1990,200)
  silkscreen extent 0,0 2120,3285, body extent 0,0 2120,3285, height 500
"SIMCOM CELL MODEM DAUGHTERBOARD" [mil] "Latium SIMCOM Cell Modem Daughterboard"
  round 20 on Mech15: GD(778.27,1471.26) GD(845,980) GD(920,1471.26) GD(1120,2065) GD(1553.11,2233.27) GD(1553.11,2375) GD(1605.63,718.27) GD(1605.63,860) GD(1855,1450)
  silkscreen extent 0,0 2080,2500, body extent 0,0 2080,2500, height 500
SOD-923 [mm] "Diode, 1.0x0.6 Body"
  rect 0.36x0.25 smd: 1(0,0) 2(0.84,0)
  silkscreen extent 1.3,-0.3 1.3,0.3, body extent 0,-0.3 0.9,0.3, height 0.4
SOT23-3_L [mm] "SOT23, 3-Leads, Body 2.9x1.3mm, Pitch 0.95mm, Lead Span 2.4mm, IPC High Density"
  rect 1.2x0.6 smd: 1(-0.9,0.95) 2(-0.9,-0.95) 3(0.9,0)
  silkscreen extent -1.02,-1.5 0.7,1.93, body extent -0.7,-1.52 0.7,1.52, height 1.12
SOT23-6_L [mm] "SOT23, 6-Leads, Body 2.9x1.6mm, Pitch 0.95mm, Lead Span 2.7mm, IPC High Density"
  rect 0.9x0.65 smd: 1(-1.2,0.95) 2(-1.2,0) 3(-1.2,-0.95) 4(1.2,-0.95) 5(1.2,0) 6(1.2,0.95)
  silkscreen extent -1.32,-1.55 0.35,1.95, body extent -0.9,-1.55 0.9,1.55, height 1.45
SOT89L [mm] "SOT89, 3-Leads, Body 4.5x2.4 mm, Pitch 1.5mm, Lead Span 4.1mm, IPC High Density"
  rect 1.2x0.5 smd: 1(-1.7,1.5) 3(-1.7,-1.5)
  rect 1.6x0.5 smd: 2(-1.5,0)
  oct 3x1.8 smd: 2(0.8,0)
  silkscreen extent -2.07,-2.3 1.3,2.42, body extent -1.3,-2.3 1.3,2.3, height 1.6
SRU1048 [mm] "Bourns SRU1048 SMD Inductor"
  rect 1.8x3.6 smd: 1(0,0) 2(8.1,0)
  silkscreen extent -1.15,-5.2 9.25,5.2, body extent -1.2,-5.2 9.3,5.3, height 4.8
TC2030-MCP [mm] "Tag Connect Microchip Programming Header"
  round 0.787 smd paste-0.4: 1(0,0) 2(0,1.27) 3(1.27,0) 4(1.27,1.27) 5(2.54,0) 6(2.54,1.27)
  round 0.2 hole 1.08 unplated: MH(-1.27,0.635) MH(3.81,-0.381) MH(3.81,1.651)
"TS-4900 DAUGHTERBOARD" [mil] "Latium TS-4900 Daughterboard"
  round 20 on Mech15: GD(150,150) GD(263.78,3423.27) GD(263.78,3565) GD(278.27,1809.37) GD(310,2590) GD(420,1809.37) GD(1210.31,3473.27) GD(1210.31,3615) GD(2038.43,1530) GD(2038.43,1671.73) GD(2095,150) GD(2115,3500)
  silkscreen extent 0,0 2245,3750, body extent 0,0 2245,3750, height 630
"WURTH 9774030243R" [mm] "Wurth 3mm SMD Threaded Standoff"
  round 5.3 hole 3 paste+0: MH(0,0)
  body extent -2.7,-2.7 2.7,2.7, height 3
"WURTH 9774060360R" [mm] "Wurth 6mm SMD Threaded Standoff"
  round 7.4 hole 4.4 paste-4: 1(0,0)
  body extent -3.7,-3.7 3.7,3.7, height 6

## Part data
C1 C2 C3 C4 C5 C6 C7 C8 C9 C10 C11 C12 C13 C14: library part Cap, "Capacitor"
D1: library part BAS70, "DIODE SCHOTTKY 100V 20A D2PAK", Manufacturer=STMicroelectronics, Supplier 1 Part Number=497-10993-1-ND, ComponentLink2Description=Datasheet, ComponentLink2URL="S:\Hardware\Data Sheets\Passive\Diodes\STPS20M100.pdf", Manufacturer Part Number=STPS20M100SG, Supplier 1=Digi-Key
D2: "DIODE ZENER 10V 225MW SOT23-3", Manufacturer="On Semiconductor", Supplier 1 Part Number=BZX84C10LT1GOSCT-ND, ComponentLink1Description="Data Sheet", ComponentLink1URL="S:\Hardware\Data Sheets\Passive\Diodes\BZX84C2V4LT1-D.pdf", Manufacturer Part Number=BZX84C10LT1G, Supplier 1=Digi-Key
D3 D7: library part LED2, "LED GRN CLEAR 2SMD BOTTOM ENTRY", Manufacturer="Wurth Electronics Inc", Manufacturer Part Number=156120VS82500, Supplier 1 Part Number=732-11424-1-ND, Supplier 1=Digi-Key
D4 D5 D9 D10 D11: library part LED2, "LED YELLOW CLEAR 2SMD", Manufacturer="Wurth Electronics Inc", Manufacturer Part Number=156120YS82500, Supplier 1 Part Number=732-11425-1-ND, Supplier 1=Digi-Key
D6: library part LED2, "LED RED CLEAR 2SMD BOTTOM ENTRY", Manufacturer="Wurth Electronics Inc", Manufacturer Part Number=156120RS82500, Supplier 1 Part Number=732-11422-1-ND, Supplier 1=Digi-Key
D8: library part LED2, "LED BLUE CLEAR 2SMD BOTTOM ENTRY", Manufacturer="Wurth Electronics Inc", Manufacturer Part Number=156120BS82500, Supplier 1 Part Number=732-11420-1-ND, Supplier 1=Digi-Key
D12 D13 D14 D15 D16 D17: library part "D Zener", "TVS DIODE 5V 9.8V SOD923", Manufacturer="ON Semiconductor", Supplier 1 Part Number=ESD9L5.0ST5GOSCT-ND, Manufacturer Part Number=ESD9L5.0ST5G, Supplier 1=Digi-Key
D18: library part LED2, "LED WHITE CLEAR 1204 SMD", Manufacturer=Inolux, Manufacturer Part Number=IN-S124BRUW, Supplier 1 Part Number=1830-1126-1-ND, Supplier 1=Digi-Key
F1 F2: library part "Fuse Thermal", "Thermal Fuse", Manufacturer="Littelfuse Inc", Manufacturer Part Number=SMDC300F/24-2, Supplier 1 Part Number=SMDC300F/24-2CT-ND, Supplier 1=Digi-Key
H1 H2 H3 H4 H5 H6 H7 H8 H9 H10 H11 H12 H13 H14 H15 H16 H17 H18 H19: library part "SMD M3 Spacer", "ROUND STANDOFF M2X0.4 STEEL 3MM", Manufacturer="Wurth Electronics Inc", Supplier 1 Part Number=732-7085-1-ND, ComponentLink1Description=Drawing, ComponentLink1URL="S:\Hardware\Data Sheets\Passive\Standoffs\Wurth 9774070360R.pdf", Height=3mm, Manufacturer Part Number=9774030243R, Supplier 1=Digi-Key
H20 H27 H28 H29 H30 H31 H32 H33 H34 H35 H36 H37: library part "Cable Clip", "CBL CLIP C-TYPE SILVER SOLDER", Manufacturer="Harwin Inc", Supplier 1 Part Number=952-1576-1-ND, ComponentLink1Description=Drawing, ComponentLink1URL="S:\Hardware\Data Sheets\Passive\Strain Reliefs\S8101R.pdf", Manufacturer Part Number=S8101-46R, Supplier 1=Digi-Key
H21 H22 H23 H24 H25 H26: library part "SMD M3 Spacer", "ROUND STANDOFF M3X0.5 STEEL 6MM", Manufacturer="Wurth Electronics Inc", Manufacturer Part Number=9774060360R, Supplier 1 Part Number=732-5273-1-ND, ComponentLink1Description=Drawing, ComponentLink1URL="S:\Hardware\Data Sheets\Passive\Spacers\Wurth 9774060360R.pdf", Height=6mm, Supplier 1=Digi-Key
J1 J2 J3 J4 J5 J6 J7 J8 J9 J10 J11 J12: library part "Amphenol 30 Pos BergStak Plug", "CONN RCPT 30POS SMD GOLD", Manufacturer="Amphenol ICC (FCI)", Manufacturer Part Number=10132798-031100LF, Supplier 1 Part Number=609-5030-1-ND, Note="Mates with 10132797-031100LF plug 3mm between board height", Supplier 1=Digi-Key
J13: library part "Header 4H", "TERM BLK 2POS SIDE ENT 3.5MM PCB", Manufacturer=Weidmuller, Supplier 1 Part Number=281-2020-ND, Manufacturer Part Number=1824420000, Supplier 1=Digi-Key
J14: library part "Header 6", "Tag Connect Programming Header"
L1: library part "Inductor Iron", "FIXED IND 3UH 6.2A 7.2 MOHM SMD", Manufacturer="Bourns Inc", Manufacturer Part Number=SRU1048-3R0Y, Supplier 1 Part Number=SRU1048-3R0YCT-ND, ComponentLink1Description="Data Sheet", ComponentLink1URL="S:\Hardware\Data Sheets\Passive\Inductors\SRU1048.pdf", Supplier 1=Digi-Key
Q1 Q8: library part NTGS3136PT1G, "MOSFET P-CH 60V TSOT26", Manufacturer="Diodes Incorporated", Supplier 1 Part Number=DMP6110SVT-7DICT-ND, ComponentLink1Description="Data Sheet", ComponentLink1URL="S:\Hardware\Data Sheets\Passive\FETs\DMP6110SVT.pdf", Manufacturer Part Number=DMP6110SVT-7, Supplier 1=Digi-Key
Q2 Q3 Q4 Q5 Q6 Q7 Q9 Q10: "MOSFET N-CH 60V 115MA SOT-23", Manufacturer="ON Semiconductor", Supplier 1 Part Number=2N7002NCT-ND, ComponentLink1Description="Data Sheet", ComponentLink1URL="S:\Hardware\Data Sheets\Active\Transistors\FETs\NDS7002A-D.pdf", Manufacturer Part Number=2N7002, Supplier 1=Digi-Key
R1 R2 R3 R4 R5 R6 R7 R9 R11 R12 R13 R14 R15 R16 R17 R18 R19 R20 R21 R22 R23 R24 R25 R26 R27 R28 R29 R30 R31 R32 R33 R34 R35 R36 R37 R38 R39 R40 R41 R42 R43 R44 R45 R46: library part Res3, "Resistor"
R8: library part "Res Varistor", "VARISTOR 8.2V 120A 0805", Manufacturer="Littelfuse Inc", Manufacturer Part Number=V5.5MLA0805H, Supplier 1 Part Number=F2215CT-ND, Supplier 1=Digi-Key
R10: library part "Res Varistor", "VARISTOR 39V 280A 1210", Manufacturer="Littelfuse Inc", Manufacturer Part Number=V30MLA1210NH, Supplier 1 Part Number=F3825CT-ND, Supplier 1=Digi-Key
U1: library part LMR14050, "IC REG BUCK ADJUSTABLE 5A 8SOPWR", Manufacturer="Texas Instruments", Supplier 1 Part Number=296-44322-1-ND, ComponentLink1Description="Data Sheet", ComponentLink1URL="S:\Hardware\Data Sheets\Active\Voltage Regulators\lmr14050.pdf", Manufacturer Part Number=LMR14050SDDAR, Supplier 1=Digi-Key
U2: library part PIC16F15323, "IC MCU 8BIT 3.5KB FLASH 14SOIC", Manufacturer="Microchip Technology", Supplier 1 Part Number=PIC16F15323T-I/SLCT-ND, Manufacturer Part Number=PIC16F15323T-I/SL, Supplier 1=Digi-Key
U3: library part LP2954AIT, "IC REG LINEAR 3.3V 150MA SOT89", Manufacturer="Diodes Incorporated", Manufacturer Part Number=AP7381-33Y-13, Supplier 1 Part Number=AP7381-33Y-13DICT-ND, Supplier 1=Digi-Key

## Via types
v1: diameter 18, hole 8, Top Layer to Bottom Layer, 492 vias
v2: diameter 50, hole 28, Top Layer to Bottom Layer, 3 vias

## Nets (pads, with @x,y where several pads share a name; then routed paths per layer and width w, separated by ;. In a path a pad name is that pad's centre, name@x,y a point inside that pad or via, vN(x,y) a via of type N, cw(c..) or ccw(c..) an arc to the next point about the centre after c; other vN are vias at no path point)
3.3V: J1.1 J2.1 J2.30 J3.1 J3.29 J9.1 J9.2 J11.1 J11.29 J11.30 R9.2 R14.2 R15.2 R20.2 R21.2 R23.2 R24.2 R25.2 R30.2 R37.2 | length 22649.9
  Top Layer w10: v1(7685,5730) R25.2@7685,5780.31 ; v1(8125,5590) 8130,5595 R37.2@8130,5635.31
  Top Layer w11.8: J3.1@2606.73,1941.54 2606.73,1983.27 2595,1995 v1(2550,1995) 2525,1995 2490,1960 2490,1785 2530,1745 2620,1745 2626.42,1751.42 J3.29@2626.42,1799.8 ; J1.1@3330,5730 3330,5690 3335,5685 v1(3380,5685) ; v1(3450,4930) 3450.47,4930.47 R9.2@3550,4930.47 ; v1(5280,6080) 5278.11,6078.11 5248.11,6078.11 5233.11,6063.11 J2.30@5233.11,6020 J2.1@5233.11,5878.27 5486.73,5878.27 v1(5810,5555) ; v1(6030,2720) 6030,2695 6047.52,2677.48 J11.30@6105,2677.48 J11.29@6105,2657.8 ; v1(6135,5230) 6145,5220 6184.69,5220 R30.2@6185,5220.31 ; J11.1@6246.73,2677.48 6287.52,2677.48 6295,2684.96 6295,2725 v1(6280,2740) ; R20.2@6270,4130.31 6324.69,4130.31 R21.2@6325,4130.63 v1(6325,4090) ; v1(6625,4740) v1(7740,4740) ; v1(7740,4680) 7740.63,4679.37 R23.2@7740.63,4550 ; v1(7740,5055) v1(7740,5545)
  Top Layer w15: v1(3450,4175) 3450.47,4175.47 R14.2@4235,4175.47 R15.2@4235,3459.53 ; v1(3510,6105) 3510,6110 3540,6140 4320,6140 4675,6495 7181.77,6495 7346.77,6330 v1(7380,6330) ; v1(5280,6180) 5280,6495 ; v1(7470,6330) 7870,6330 8045,6155 v1(8045,5990) 8025,5990 8010,5975 J9.1@8010,5938.43 8010,5925
  Bottom Layer w10: v1(7685,5730) 7700,5730 7721,5751 7746,5751 7775,5780 ; v1(8045,5990) 8085,5950 8085,5630 v1(8125,5590)
  Bottom Layer w11.8: v1(5810,5555) 5958.1,5406.9 5958.1,5375.93 5990.93,5343.1 6021.9,5343.1 v1(6135,5230) ; v1(6030,2720) 6070,2760 6260,2760 v1(6280,2740) ; v1(6325,4090) 6510,4090 6625,4205 v1(6625,4740) ; v1(7740,4680) v1(7740,4740) v1(7740,5055) ; v1(7740,5545) 7740,5675 7775,5710 7775,5780 7985,5990 v1(8045,5990)
  Bottom Layer w15: v1(2550,1995) 2550,2095 2615,2160 2880,2160 ; v1(3380,5685) 3510,5685 ; v1(3510,6105) 3510,5685 ; v1(5280,6080) v1(5280,6180) ; v1(6030,2720) 6090,2660 6090,2375.2 6088.53,2373.73 6088.53,2298.53 5890,2100 4190,2100 4130,2160 2880,2160 ; v1(7380,6330) v1(7470,6330) ; 2880,2160 2880,3110 3450,3680 v1(3450,4175) v1(3450,4930) 3450,5185 3510,5245 3510,5685
5V: C4.2 C5.2 C6.2 C8.2 C9.1 C10.1 C11.1 J4.1 J4.2 J4.3 J4.4 J5.16 J5.17 J5.18 J5.19 J5.20 J5.21 J6.1 J6.2 J6.3 J6.4 J6.5 J6.6 J7.1 J7.2 J7.3 J7.4 J7.5 J7.6 J12.1 J12.2 J12.3 J12.4 L1.2 R6.2 R8.2 R12.1 R13.1 R16.1 R17.1 R18.1 R19.1 | length 2115.1
  Top Layer w10: v1(1300,3575) R16.1@1300,3630.47 ; v1(1645,4555) 1650,4560 R12.1@1650,4595.47 ; R19.1@1650,2665.47 1705.47,2665.47 v1(1710,2670) ; v1(2450,2260) 2450,2240.47 R18.1@2480.47,2210 ; v1(2540,5065) R13.1@2540,5105.47 ; R17.1@3550,2325.47 3600.47,2325.47 v1(3600.47,2329.53)
  Top Layer w11.8: v1(1885,3885) 1895.31,3895.31 J4.4@1895.31,3950 ; v1(1915,3875) J4.3@1915,3950 ; J4.2@1934.68,3950 1934.68,3870.32 v1(1940,3865) ; J4.1@1954.37,3950 1954.37,3900.63 v1(1960,3895) ; v1(4240,2240) 4240.63,2239.37 J6.3@4330,2239.37 ; v1(4255,2285) 4261.26,2278.74 J6.5@4330,2278.74 ; v1(4265,2310) 4276.57,2298.43 J6.6@4330,2298.43 J6.5@4330,2278.74 ; v1(4270,2195) 4275,2200 J6.1@4330,2200 J6.2@4330,2219.69 J6.3@4330,2239.37 ; J5.21@5462.8,4363.27 5462.8,4412.8 v1(5465,4415) ; v1(5470,4305) 5482.48,4317.48 J5.20@5482.48,4363.27 ; v1(5500,4415) 5502.17,4412.83 J5.19@5502.17,4363.27 ; v1(5510,4305) 5513.7,4305 5521.85,4313.15 J5.18@5521.85,4363.27 ; J5.17@5541.54,4363.27 5541.54,4411.54 v1(5545,4415) ; v1(5560,4305) 5561.22,4306.22 J5.16@5561.22,4363.27 ; v1(5875,4170) 5881.22,4163.78 J7.1@5975,4163.78 J7.2@5975,4183.47 ; v1(5890,4240) 5892.52,4242.52 J7.5@5975,4242.52 ; v1(5895,4190) 5901.53,4183.47 J7.2@5975,4183.47 ; v1(5895,4270) 5902.79,4262.21 J7.6@5975,4262.21 J7.5@5975,4242.52 ; v1(5910,4210) 5916.85,4203.15 J7.3@5975,4203.15 ; J12.4@8593.11,1640 8593.11,1581.89 v1(8595,1580) ; v1(8610,1700) 8612.8,1697.2 J12.3@8612.8,1640 ; v1(8630,1580) 8632.48,1582.48 J12.2@8632.48,1640 ; v1(8650,1700) 8652.17,1697.83 J12.1@8652.17,1640 ; J6.3@4330,2239.37 J6.4@4330,2259.06 J6.5@4330,2278.74 ; J7.2@5975,4183.47 J7.3@5975,4203.15 ; J7.3@5975,4203.15 J7.4@5975,4222.84 J7.5@5975,4242.52
  other v1: 6830,2910 6945,2910 7080,2910 6765,2975 7155,2980 6770,3110 7150,3175 6770,3230 6830,3330 7150,3380 6835,3395 6830,3540 7160,3545 7250,3620 6805,3675 7130,3680 7215,3780
C\E\L\L\_\1\.\8\V\_\G\O\O\D\: J5.15 J10.13 | length 3122.7
  Top Layer w10: J5.15@5561.22,4505 5561.22,4656.22 5581,4676 6286.21,4676 6320.21,4710 v1(6440,4710) ; v1(6520,4710) 6520,4795 6568,4843 7742.96,4843 7812.06,4773.9 7812.06,4652.06 v1(7805,4645) ; v1(7960,4465) 7966.85,4458.15 J10.13@7966.85,4320
  Bottom Layer w10: v1(6440,4710) v1(6520,4710) ; v1(7805,4645) 7805,4550 7890,4465 v1(7960,4465)
C\E\L\L\_\W\A\K\E\_\H\O\S\T\: J5.23 J10.4 R23.1 | length 2964.4
  Top Layer w10: J5.23@5423.43,4363.27 5423.43,4448.43 5435,4460 5575,4460 5580,4465 5580,4650.96 5588.04,4659 6293.25,4659 6314.25,4680 v1(6440,4680) ; v1(6505,4665) 6512,4672 7448.3,4672 7561.3,4559 7641,4559 7685,4515 7789.69,4515 ; R23.1@7780,4550 7789.69,4540.31 7789.69,4515 ; J10.4@7789.69,4320 7789.69,4515
  Bottom Layer w10: v1(6440,4680) 6490,4680 v1(6505,4665)
C\O\N\T\R\O\L\L\E\R\_\G\R\E\E\N\_\L\E\D\: D7.2 J7.26 | length 2760
  Top Layer w10: D7.2@4280.37,3299.5 4280.37,4095.37 4292,4107 5738,4107 v1(5745,4100) ; v1(5745,4145) 5748,4142 6022,4142 6040,4160 6040,4215 6067.52,4242.52 J7.26@6116.73,4242.52
  Bottom Layer w10: v1(5745,4100) v1(5745,4145)
C\O\N\T\R\O\L\L\E\R\_\R\E\D\_\L\E\D\: D6.2 J7.27 | length 2101.9
  Top Layer w10: D6.2@4280.37,4325.5 4280.37,4134.63 4291,4124 6029,4124 6065,4160 6065,4210 6077.84,4222.84 J7.27@6116.73,4222.84
CELL_ACTIVITY_LED: J7.19 Q3.1 | length 4443.9
  Top Layer w10: Q3.1@2713.31,5322.6 3277.6,5322.6 3582.69,5627.69 4329.98,5627.69 4643.67,5314 5582.92,5314 5931.92,4965 6015,4965 v1(6075,4905) ; J7.19@6116.73,4380.32 6180.32,4380.32 6210,4410 6210,4485 v1(6205,4490)
  Bottom Layer w10: v1(6075,4905) 6075,4645 6205,4515 v1(6205,4490)
CELL_CTS: J5.3 J10.8 R26.2 | length 3375.2
  Top Layer w10: J5.3@5325,4505 5325,4665.96 5403.04,4744 6258.04,4744 6344.04,4830 v1(6440,4830) ; v1(6550,4900) 6556,4894 7766,4894 7865.74,4794.26 7865.74,4634.57 R26.2@7895.31,4605 7868.43,4578.11 J10.8@7868.43,4320
  Bottom Layer w10: v1(6440,4830) 6540,4830 6550,4840 v1(6550,4900)
CELL_DTR: J5.2 J10.7 R32.2 | length 3359.6
  Top Layer w10: J5.2@5305.32,4505 5305.32,4609.37 R32.2@5264.69,4650 5264.69,4659.69 5383,4778 6243.96,4778 6355.96,4890 v1(6440,4890) ; v1(6525,4890) 6538,4877 7757.04,4877 7848.74,4785.3 J10.7@7848.74,4320
  Bottom Layer w10: v1(6440,4890) v1(6525,4890)
CELL_PRESENT: J2.2 J10.1 R2.2 | length 3932.5
  Top Layer w10: J2.2@5213.42,5878.27 5213.42,5801.26 R2.2@5225,5789.69 5265.31,5789.69 5265.31,5504.69 5269,5501 5832.92,5501 5890.92,5559 6354.08,5559 6540,5373.08 6540,4985 6499,4944 6499,4701.3 6511.3,4689 7461,4689 v1(7570,4580) ; v1(7670,4435) 7730.63,4374.37 J10.1@7730.63,4320
  Bottom Layer w10: v1(7570,4580) 7670,4480 v1(7670,4435)
CELL_RI: J5.1 J10.6 R31.2 | length 3335.4
  Top Layer w10: R31.2@5264.37,4595 5285.63,4573.74 5285.63,4560 ; v1(5270,4560) 5285.63,4560 ; J5.1@5285.63,4505 5285.63,4560 ; v1(5295,4660) 5396,4761 6251,4761 6350,4860 v1(6440,4860) ; v1(6525,4860) 7750,4860 7829.06,4780.94 J10.6@7829.06,4320
  Bottom Layer w10: v1(5270,4560) 5295,4585 v1(5295,4660) ; v1(6440,4860) v1(6525,4860)
CELL_RTS: J5.4 J10.9 R27.2 | length 3442.2
  Top Layer w10: J5.4@5344.69,4505 5344.69,4661.6 5410.08,4727 6265.08,4727 6338.08,4800 v1(6440,4800) ; v1(6570,4920) 6570,4915 6574,4911 7773.04,4911 7882.74,4801.3 7882.74,4672.26 7895,4660 v1(7895,4650) ; J10.9@7888.11,4320 7888.11,4515 ; R27.2@7895.31,4550 7888.11,4542.8 7888.11,4515 ; v1(7900,4515) 7888.11,4515
  Bottom Layer w10: v1(6440,4800) 6460,4800 6473,4813 6547.04,4813 6571,4836.96 6571,4908.7 6570,4909.7 v1(6570,4920) ; v1(7895,4650) 7895,4520 v1(7900,4515)
CELL_USB_DM: D13.2 J5.27 J10.3 | length 2870.2
  Top Layer w10: J5.27@5344.69,4363.27 5344.69,4281.27 5387.96,4238 5632.04,4238 5939.04,4545 6365.96,4545 6437.96,4473 7587,4473 7695,4365 7695,4275 7704,4266 7708.7,4266 7709.7,4265 7760,4265 7770,4275 J10.3@7770,4320
CELL_USB_DP: D12.2 J5.26 J10.2 | length 2753.3
  Top Layer w10: J5.26@5364.37,4363.27 5364.37,4285.63 5395,4255 5625,4255 5932,4562 6373,4562 6445,4490 7665,4490 7750.32,4404.68 J10.2@7750.32,4320
DBG_HOSTRX_SATTX: J6.18 J9.23 | length 6129.6
  Top Layer w10: J6.18@4471.73,2436.22 4533.78,2436.22 4558.83,2411.17 5380,2411.17 5542,2573.17 5542,2877 5945,3280 6100,3280 6110,3290 v1(6115,3290) ; v1(7445,5525) 7450,5530 7450,5550.96 7552.04,5653 7749.92,5653 7790.77,5693.85 7790.77,5776.73 7814.67,5800.63 J9.23@7868.27,5800.63
  Bottom Layer w10: v1(6115,3290) 6115,3185 6158,3142 6207,3142 6380.27,3315.27 6380.27,3824.11 6718,4161.83 6718,5170.88 7080.12,5533 7408.08,5533 7416.08,5525 v1(7445,5525)
DBG_HOSTTX_SATRX: J6.19 J9.24 | length 6111.4
  Top Layer w10: J6.19@4471.73,2416.54 4528.46,2416.54 4550.83,2394.17 5387.04,2394.17 5559,2566.12 5559,2866.12 5953.88,3261 6115.7,3261 6126.66,3271.96 6126.96,3271.96 v1(6145,3290) ; v1(7425,5550) 7545,5670 7742.88,5670 7773.77,5700.9 7773.77,5783.77 7810.31,5820.31 J9.24@7868.27,5820.31
  Bottom Layer w10: v1(6145,3290) 6145,3180 6145.3,3180 6166.3,3159 6199.96,3159 6363.27,3322.32 6363.27,3831.15 6701,4168.88 6701,5177.92 7073.08,5550 v1(7425,5550)
E\X\P\_\C\S\: J9.12 J12.27 R37.1 | length 4662.4
  Top Layer w10: J9.12@8010,5721.89 8113.11,5721.89 v1(8121.56,5713.44) 8130,5705 R37.1@8130,5674.69 ; v1(8310,5620) 8325,5620 8345.69,5640.69 8434.31,5640.69 8435.46,5639.54 8435.46,5086.62 8402,5053.17 8402,4965.88 8483.88,4884 8616,4884 v1(8620,4880) ; v1(8590,1960) 8593.11,1956.89 J12.27@8593.11,1781.73
  Bottom Layer w10: v1(8121.56,5713.44) 8131,5704 8193.7,5704 8194.7,5705 8235,5705 8289,5651 8289,5641.3 8310,5620.3 v1(8310,5620) ; v1(8590,1960) 8590,1964.04 8489.04,2065 8489.04,2630 8610,2750.96 8610,4870 v1(8620,4880)
EXP_PRESENT: J9.15 J11.2 R4.2 | length 4553.4
  Top Layer w10: J11.2@6246.73,2657.8 6330,2657.8 ; v1(6280,3085) 6269,3074 6269,2905.04 6382,2792.04 6382,2653 6390,2645 v1(6395,2645) ; v1(6330,2645) 6330,2657.8 ; R4.2@6330,2685 6330,2657.8 ; v1(7545,5410) 7550,5415 7550,5445 7544,5451 7544,5524.75 7587.25,5568 7802,5568 7815,5555 8000,5555 8010,5565 J9.15@8010,5662.83
  Bottom Layer w10: v1(6280,3085) 6280,3094.79 6465.27,3280.07 6465.27,3788.9 6803,4126.63 6803,5135.67 7115.33,5448 7362,5448 7377.44,5432.56 7380.57,5432.56 7380.85,5432.84 7380.85,5432.98 7388.83,5425 7475.96,5425 7483.96,5417 7508,5417 7515,5410 v1(7545,5410) ; v1(6330,2645) v1(6395,2645)
EXP_RESET: J9.8 J12.19 R41.2 | length 4902
  Top Layer w10: J9.8@8010,5800.63 8115.63,5800.63 v1(8135,5820) R41.2@8135,5855.31 ; v1(8240,5940) 8251,5951 8395.92,5951 8503.46,5843.46 8503.46,5058.46 8470,5025 8470,4995 8485,4980 8540,4980 v1(8550,4990) ; v1(8435,1960) 8435.63,1959.37 J12.19@8435.63,1781.73
  Bottom Layer w10: v1(8135,5820) 8190,5820 8220,5850 8220,5920 v1(8240,5940) ; v1(8435,1960) 8435,1965 8415,1985 8415,2655.96 8542,2782.96 8542,4967 8550,4975 v1(8550,4990)
EXP_SPI_CLK: J9.9 J12.21 R40.2 | length 4734.1
  Top Layer w10: J9.9@8010,5780.94 8170.94,5780.94 8190,5800 ; R40.2@8190,5855.63 8190,5800 ; J12.21@8475,1781.73 v1(8475,1960) ; v1(8570,4960) 8480,4960 8453,4987 8453,5032.04 8486.46,5065.5 8486.46,5780 8210,5780 8190,5800
  Bottom Layer w10: v1(8475,1960) 8435,2000 8435,2650 8559,2774 8559,4949 v1(8570,4960)
EXP_SPI_MISO: J9.11 J12.25 R38.2 | length 4667.9
  Top Layer w10: J9.11@8010,5741.57 8168.43,5741.57 v1(8185,5725) R38.2@8185,5674.69 ; v1(8310,5650) 8317.69,5657.69 8443.27,5657.69 8452.46,5648.5 8452.46,5079.58 8419,5046.12 8419,4972.92 8465.92,4926 8509.96,4926 8517.96,4918 8577.3,4918 8590.3,4905 v1(8605,4905) ; J12.25@8553.74,1781.73 8553.74,1958.74 v1(8555,1960)
  Bottom Layer w10: v1(8185,5725) 8255,5725 8310,5670 v1(8310,5650) ; v1(8555,1960) 8555,1975 8470,2060 8470,2635 8593,2758 8593,4893 v1(8605,4905)
EXP_SPI_MOSI: J9.10 J12.23 R39.2 | length 4652.1
  Top Layer w10: J9.10@8010,5761.26 8238.74,5761.26 8240,5760 R39.2@8240,5674.69 8450.31,5674.69 8469.46,5655.54 8469.46,5072.54 8436,5039.08 8436,4979.96 8472.96,4943 8517,4943 8525,4935 v1(8590,4935) ; J12.23@8514.37,1781.73 8515,1782.36 v1(8515,1960)
  Bottom Layer w10: v1(8515,1960) 8515,1980 8452,2043 8452,2642.96 8576,2766.96 8576,4921 v1(8590,4935)
EXP_USB_DM: D17.2 J9.14 J11.25 | length 7068.1
  Top Layer w10: v1(5995,2580) 5995.94,2579.06 J11.25@6105,2579.06 ; J9.14@8010,5682.52 8052.48,5682.52 8065,5670 8065,5550 D17.2@8085,5530 8105,5510 v1(8105,5480)
  Bottom Layer w10: v1(5995,2580) 5570,2580 5220,2930 5220,3255 4935,3540 4935,4920 5770,5755 7410,5755 7725,5440 8065,5440 v1(8105,5480)
EXP_USB_DP: D16.2 J9.13 J11.26 | length 7132
  Top Layer w10: v1(5995,2605) 6000,2605 6006.26,2598.74 J11.26@6105,2598.74 ; J9.13@8010,5702.2 8067.8,5702.2 8085,5685 8085,5570 D16.2@8130,5525 8155,5500 8155,5470 v1(8140,5455)
  Bottom Layer w10: v1(5995,2605) 5980,2605 5972,2597 5577.04,2597 5237,2937.04 5237,3262.04 4952,3547.04 4952,4912.96 5777.04,5738 7402.96,5738 7720.96,5420 8069.04,5420 8104.04,5455 v1(8140,5455)
FVin: C13.2 F1.2 F2.2 Q8.4 R10.2 R42.2 U3.3